# Altium PCB nRF2788_Wireless Mic TX_rev 1_0.PcbDoc
Units mil, origin at the board's own origin, x right, y up, seen from the top; angles counter-clockwise.
Board outline 787.4 x 3270 mil, 2 copper layers (Top Layer, Bottom Layer); 64 components, 42 nets, 212 pads, 162 vias.
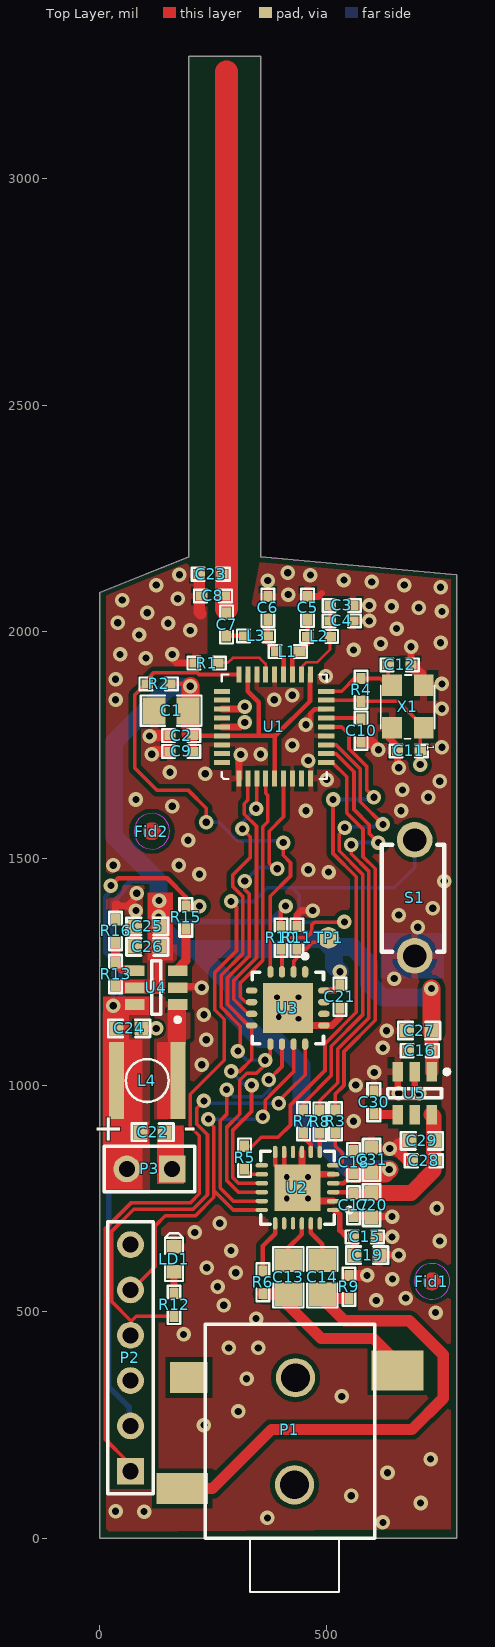
[diagram p0: Top Layer view]
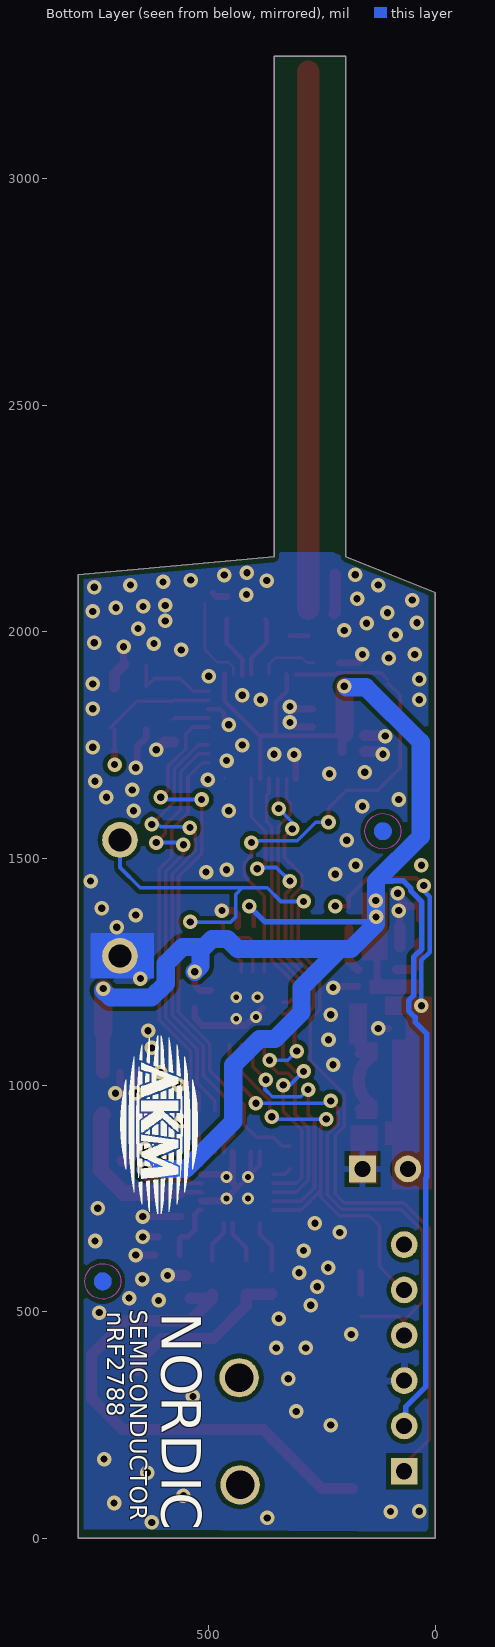
[diagram p1: Bottom Layer view, seen from below]

## Layer stack, top to bottom
Top Layer: signal copper 1.4
Dielectric: core 12.6, FR-4, Dk 4.8
Bottom Layer: signal copper 1.4

## Board outline
0,0 0,2086.61 196.85,2165.35 196.85,3270 355,3270 355,2165 787.4,2125.52 787.4,0

## Design rules (kind name [scope] priority, off if disabled: settings)
Clearance Clearance_2 [(InNamedPolygon('Bot_GND'))] p1: gap=10
Clearance Clearance_1 [(InNamedPolygon('Top_GND'))] p2: gap=10
Clearance [All] p3: gap=6
ComponentClearance [All] p1: gap=0 collisioncheckmode=3 verticalgap=10 showdistances=FALSE
MinimumSolderMaskSliver [All] p1: minsoldermaskwidth=0
PolygonConnect PolygonConnect_1 [isVia and innet(gnd)] p1: connectstyle=Direct reliefconductorwidth=10 reliefentries=4 polygonreliefangle="90 Angle"
PolygonConnect [All] p2: connectstyle=Relief reliefconductorwidth=15 reliefentries=4 polygonreliefangle="90 Angle"
RoutingVias [All] p1: holewidth=28 width=50 viastyle="Through Hole" minholewidth=28 minwidth=50 maxholewidth=28 maxwidth=50
SilkToSilkClearance [All] p1: silktosilkclearance=0
SilkscreenOverComponentPads [All] p1: minsilkscreentomaskgap=0
SolderMaskExpansion [All] p1: expansion=4
Width [All] p1: maxlimit=200 minlimit=6 preferedwidth=10 minimp=50.000000 maximp=50.000000 favimp=50.000000
24 further rules are at their usual default settings.

## Classes and differential pairs
component class nRF2460: C1 C2 C3 C4 C5 C6 C7 C8 C9 C10 C11 C12 C23 L1 L2 L3 R1 R2 R4 U1 X1
component class ADC: C13 C14 C15 C17 C18 C19 C20 C31 P1 R3 R5 R6 R7 R8 R9 U2
component class MCU: C16 C21 C22 C24 C25 C26 C27 C28 C29 C30 Fid1 Fid2 L4 LD1 P2 P3 R10 R11 R12 R13 R15 R16 S1 TP1 U3 U4 U5

## Components (designator, comment, footprint, x,y, rotation, side; value= is the part's Value field where it differs from the comment)
C1 "4.7µF" 0805 195,1826 r180 top
C2 "1.0nF" 0402s#1 205,1771 r180 top
C3 "2.2nF" 0402s#1 559,2058 r180 top
C4 "N.C." 0402s#1 559,2024 r180 top
C5 "1.2pF" 0402s#1 459,2078 r270 top
C6 "1.2pF" 0402s#1 371,2028 r90 top
C7 "1.5pF" 0402s#1 280,2041 r270 top
C8 "1.2pF" 0402s#1 225,2079 r0 top
C9 "10nF" 0402s#1 205,1736 r180 top
C10 "33nF" 0402s#1 577,1757 r90 top
C11 "15pF" 0402s#1 657,1737 r0 top
C12 "15pF" 0402s#1 687,1927 r180 top
C13 "10µF" 0805 416.38,538.62 r90 top
C14 "10µF" 0805 491.38,538.62 r90 top
C15 "100nF" 0402s#1 610,665 r180 top
C16 "100nF" 0402s#2 706,1076 r0 top
C17 "100nF" 0402s#1 560,710 r90 top
C18 "100nF" 0402s#1 560,805 r90 top
C19 "2.2µF" 0603s 590,625 r180 top
C20 "10µF" 0603s 600,735 r90 top
C21 "100nF" 0402s#1 530,1170 r90 top
C22 "4.7µF" 0603s 117,896 r180 top
C23 "N.C." 0402s#2 245,2127 r0 top
C24 "4.7µF" 0603s 65,1125 r180 top
C25 "4.7µF" 0603s 105,1350 r0 top
C26 "4.7µF" 0603s 105,1305 r0 top
C27 "1.0µF" 0603s 705,1120 r0 top
C28 "100nF" 0402s#2 715,833 r0 top
C29 "1.0µF" 0603s 711,877 r0 top
C30 "10nF" 0402s#2 605,962 r270 top
C31 "10µF" 0603s 600,835 r90 top
Fid1 "Fiducial mark" Fiducial 733,567 r90 top
Fid2 "Fiducial mark" Fiducial 115.13,1560 r90 top
L1 "4.7nH" 0402s#1 390,1956 r0 top
L2 "8.2nH" 0402s#1 459,1990 r0 top
L3 "5.6nH" 0402s#1 370,1991 r180 top
L4 "4.7µH" WE-TPC_TYPE_S 105,1010 r90 top
LD1 "L0603W" LED_0603 164,643 r270 top
P1 "Header 3" HEADPHONE 607,0 r90 top
P2 "Header 6" HDR1X6 68,148 r90 top
P3 "Header 2" HDR1X2 160,815 r180 top
R1 "22k" 0402s#1 211,1931 r0 top
R2 "22k" 0402s#1 105,1885 r0 top
R3 "56R" 0402s#2 520,920 r90 top
R4 "1M0" 0402s#1 577,1897 r270 top
R5 "56R" 0402s#1 320,815 r90 top
R6 "1k" 0402s#1 360,540 r90 top
R7 "56R" 0402s#1 450,895 r90 top
R8 "56R" 0402s#1 485.59,894.41 r90 top
R9 "1k" 0402s#1 550,580 r270 top
R10 "47k" 0402s#1 400,1300 r90 top
R11 "10k" 0402s#1 435,1300 r90 top
R12 "1k" 0402s#1 164,490 r90 top
R13 "1M0" 0402s#2 35,1245 r270 top
R15 "0R" 0402s#2 190,1370 r270 top
R16 "180k" 0402s#2 35,1340 r270 top
S1 "SW-PB" E-Switch 695,1285 r90 top
TP1 "TP" TP 505,1325 r90 top
U1 "nRF2460" Nordic_QFN36 385,1791 r90 top
U2 "AK5700VN" QFN50P400X400X80-24N 436.38,773.62 r180 top
U3 "16F684" QFN65P400X400X100-16N 415,1170 r270 top
U4 "TPS61070" SOT95P280X110-6N 125,1215 r180 top
U5 "TPS78930" SOT95P280X145-6N 695,982 r270 top
X1 "16MHz" BT-XTAL_3225 680,1835 r90 top

## Footprints (in the part's own frame and the unit in brackets; to place one, negate y for a bottom-side part, rotate by r counter-clockwise, add the part's x,y. Pads: shape width x height; smd on the part's side, far side on the other; paste and mask are expansions set on the pad)
0402s#1 [mil] "SMD 0402s footprint"
  rect 25x20 smd: 1(0,0) 2(50,0)
  silkscreen extent -17,-14 67,14
0402s#2 [mil] "SMD 0402s footprint"
  rect 25x20 smd: 1(-25,0) 2(25,0)
  silkscreen extent -42,-14 42,14
0603s [mil] "SMD 0603s footprint"
  rect 30x30 smd: 1(-27,0) 2(27,0)
  silkscreen extent -46,-19 46,19
0805 [mm] "SMD 0805 footprint"
  rect 1.3x1.5 smd: 1(0,0) 2(1.9,0)
  silkscreen extent -0.75,-0.85 2.65,0.85
BT-XTAL_3225 [mm] "Mercury X32 series"
  rect 1.2x1.1 smd: 1(-1.194,-0.89) 2(1.194,-0.89) 3(1.194,0.888) 4(-1.194,0.891)
  silkscreen extent -1.8,-1.5 1.78,1.52
E-Switch [mm]
  round 2 hole 1.3: 1(0,0) 2(6.5,0)
  silkscreen extent 0.22,-1.65 6.22,1.85
Fiducial [mil] "Fiducial Mark"
  Top Layer circle w19.68: c0,0 r9.87
  Bottom Layer circle w19.68: c0,0 r9.87
  Keep-Out Layer circle w0.39: c0,0 r39.37
HDR1X2 [mm] "Connector; Header; 2 Position"
  rect 1.5x1.5 hole 0.9: 1(0,0)
  round 1.5 hole 0.9: 2(2.54,0)
  silkscreen extent -1.27,-1.27 3.81,1.27
HDR1X6 [mm] "Connector; Header; 6 Position"
  rect 1.5x1.5 hole 0.9: 1(0,0)
  round 1.5 hole 0.9: 2(2.54,0) 3(5.08,0) 4(7.62,0) 5(10.16,0) 6(12.7,0)
  silkscreen extent -1.27,-1.27 13.97,1.27
HEADPHONE [mm]
  round 2.2 hole 1.6: 0(3,4.5) 0(9,4.445)
  rect 1.75x2.1 smd: 1(9.017,10.414)
  rect 2.25x2.9 smd: 2(9.398,-1.27)
  rect 1.75x2.9 smd: 3(2.794,10.795)
  silkscreen extent -3,0 12,9.5, body extent 0,0 12,9.5, height 5
LED_0603 [mil]
  rect 30x32 smd: 1(0,0) 2(55,0)
  silkscreen extent -30,-20 75,20
Nordic_QFN36 [mm]
  rect 0.9x0.28 smd: 1(-2.916,1.975) 2(-2.916,1.475) 3(-2.916,0.975) 4(-2.916,0.475) 5(-2.916,-0.025) 6(-2.916,-0.525) 7(-2.916,-1.025) 8(-2.916,-1.525) 9(-2.916,-2.025) 19(2.916,-2.025) 20(2.916,-1.525) 21(2.916,-1.025) 22(2.916,-0.525) 23(2.916,-0.025) 24(2.916,0.475) 25(2.916,0.975) 26(2.916,1.475) 27(2.916,1.975)
  rect 0.28x0.9 smd: 10(-2.025,-2.916) 11(-1.525,-2.916) 12(-1.025,-2.916) 13(-0.525,-2.916) 14(-0.025,-2.916) 15(0.475,-2.916) 16(0.975,-2.916) 17(1.475,-2.916) 18(1.975,-2.916) 28(1.975,2.916) 29(1.475,2.916) 30(0.975,2.916) 31(0.475,2.916) 32(-0.025,2.916) 33(-0.525,2.916) 34(-1.025,2.916) 35(-1.525,2.916) 36(-2.025,2.916)
  silkscreen extent -2.94,-2.94 2.91,2.94
QFN50P400X400X80-24N [mm] "QFN, 24-Leads, Body 4,1x4,1mm (max), Pitch 0,50mm, IPC Medium Density"
  oval 0.7x0.25 smd: 1(-2,1.25) 2(-2,0.75) 3(-2,0.25) 4(-2,-0.25) 5(-2,-0.75) 6(-2,-1.25) 13(2,-1.25) 14(2,-0.75) 15(2,-0.25) 16(2,0.25) 17(2,0.75) 18(2,1.25)
  oval 0.25x0.7 smd: 7(-1.25,-2) 8(-0.75,-2) 9(-0.25,-2) 10(0.25,-2) 11(0.75,-2) 12(1.25,-2) 19(1.25,2) 20(0.75,2) 21(0.25,2) 22(-0.25,2) 23(-0.75,2) 24(-1.25,2)
  rect 2.6x2.6 smd: 25(0,0)
  silkscreen extent -3.03,-2.05 2.05,2.05, body extent -2.05,-2.05 2.05,2.05, height 0.8
QFN65P400X400X100-16N [mm] "QFN, 16-Leads, Body 4,0x4,0mm (max), Pitch 0,65mm, IPC Medium Density"
  oval 0.65x0.35 smd: 1(-2.025,0.975) 2(-2.025,0.325) 3(-2.025,-0.325) 4(-2.025,-0.975) 9(2.025,-0.975) 10(2.025,-0.325) 11(2.025,0.325) 12(2.025,0.975)
  oval 0.35x0.65 smd: 5(-0.975,-2.025) 6(-0.325,-2.025) 7(0.325,-2.025) 8(0.975,-2.025) 13(0.975,2.025) 14(0.325,2.025) 15(-0.325,2.025) 16(-0.975,2.025)
  rect 2.8x2.8 smd: 17(0,0)
  silkscreen extent -3.02,-2 2,2, body extent -2,-2 2,2, height 1
SOT95P280X110-6N [mm] "SOT23, 6-Leads, Body 3,0x3,0mm (max), Pitch 0,95mm, IPC Medium Density"
  rect 1.1x0.6 smd: 1(-1.2,0.95) 2(-1.2,0) 3(-1.2,-0.95) 4(1.2,-0.95) 5(1.2,0) 6(1.2,0.95)
  silkscreen extent -1.33,-1.5 0.25,1.92, body extent -0.87,-1.52 0.87,1.53, height 1.1
SOT95P280X145-6N [mm] "SOT23, 6-Leads, Body 3,0x3,0mm (max), Pitch 0,95mm, IPC Medium Density"
  rect 1.1x0.6 smd: 1(-1.2,0.95) 2(-1.2,0) 3(-1.2,-0.95) 4(1.2,-0.95) 5(1.2,0) 6(1.2,0.95)
  silkscreen extent -1.32,-1.5 0.25,1.92, body extent -0.87,-1.52 0.87,1.53, height 1.45
TP [mm]
  round 1.2 smd paste-1.2: 1(0,0)
WE-TPC_TYPE_S [mm] "Inductor SMD"
  rect 4.3x0.85 smd: 1(0,1.725) 2(0,-1.725)
  Top Layer lines w0.15: -2.075,1.7 -2.075,0.625 -1.2,0.625 ; 2.075,1.5 2.075,0.625 1.2,0.625 ; -1.2,-0.625 -2.075,-0.625 -2.075,-1.7 ; 1.2,-0.625 2.075,-0.625 2.075,-1.7
  Top Layer lines w0.5: -1.9,1.9 -1.9,1.725 -1.9,0.8 ; -1.5,1.8 -1.5,1.725 -1.5,0.8 ; 1.5,1.8 1.5,1.725 1.5,0.8 ; 1.9,1.8 1.9,1.725 1.9,0.8 ; -1.9,-0.8 -1.9,-1.5 ; -1.6,-0.8 -1.6,-1.6 ; 1.5,-0.8 1.5,-1.6 ; 1.9,-0.8 1.9,-1.6
  Top Layer lines w0.7: -1.332,0.922 cw(c0,0) 1.332,0.922 ; -1.332,-0.922 ccw(c0,0) 1.332,-0.922
  silkscreen extent -1.2,-1.2 1.2,1.2

## Part data
C1: library part C0805-4µ7, "Chip Cap 0805"
C2: library part C0402-1n0, "Chip Cap 0402"
C3: library part C0402-2n2, "Chip Cap 0402"
C4 C23: library part C0402-N.C., "Chip Cap 0402"
C5 C6 C8: library part C0402-1.2p, "Chip Cap 0402"
C7: library part C0402-1.5p, "Chip Cap 0402"
C9 C30: library part C0402-10n, "Chip Cap 0402"
C10: library part C0402-33n, "Chip Cap 0402"
C11 C12: library part C0402-15p, "Chip Cap 0402"
C13 C14: library part C0805-10µ, "Chip Cap 0805"
C15 C16 C17 C18 C21 C28: library part C0402-100n, "Chip Cap 0402"
C19: library part C0603-2µ2, "Chip Cap 0603"
C20 C31: library part C0603-10µ, "Chip Cap 0603"
C22 C24 C25 C26: library part C0603-4µ7, "Chip Cap 0603"
C27 C29: library part C0603-1µ0, "Chip Cap 0603"
Fid1 Fid2: library part Fid-Mark, "Fiducial Mark"
L1: library part L0402-4n7, "Chip Ind 0402"
L2: library part L0402-8n2, "Chip Ind 0402"
L3: library part L0402-5n6, "Chip Ind 0402"
L4: library part "WE-TPC Type S - 4µ7", "Inductor Power 4.7uH 1.2A SMD"
LD1: library part 19-213/W1D, "LED 0603, 19-213/W1D"
P1: "Header, 3-Pin"
P2: "Header, 6-Pin"
P3: "Header, 2-Pin"
R1 R2: library part R0402-22k, "Chip Res 0402"
R3 R5 R7 R8: library part R0402-56R, "Chip Res 0402"
R4 R13: library part R0402-1M0, "Chip Res 0402"
R6 R9 R12: library part R0402-1k0, "Chip Res 0402"
R10: library part R0402-47k, "Chip Res 0402"
R11: library part R0402-10k, "Chip Res 0402"
R15: library part R0402-0R, "Chip Res 0402"
R16: library part R0402-180k, "Chip Res 0402"
S1: "Switch"
U1: "2.4GHz Single Chip Wireless Audio Streamer"
U4: "IC BOOST CONV 600MA SW TSOT23-6"
X1: library part "XTAL SMD 16MHz (3225)", "XTAL SMD 16MHz, 9pF, Mercury"

## Via types
v1: diameter 32, hole 16, Top Layer to Bottom Layer, tented top, 154 vias
v2: diameter 25.98, hole 12.99, Top Layer to Bottom Layer, tented top, 8 vias

## Nets (pads, with @x,y where several pads share a name; then routed paths per layer and width w, separated by ;. In a path a pad name is that pad's centre, name@x,y a point inside that pad or via, vN(x,y) a via of type N, cw(c..) or ccw(c..) an arc to the next point about the centre after c; other vN are vias at no path point)
AVDD: C17.2 C20.2 C28.2 C29.2 U2.3 U5.6 | length 537.4
  Top Layer w10: U2.3 556.22,763.78 C17.2 ; 732.4,857 U5.6
  Top Layer w20: C17.2 685,760 687,762
  Top Layer w35: C20.2 687,762 737,812 737,855 ; U5.6 737,930.16 737,852
DVDD: C1.1 C2.1 C9.1 C16.2 C18.1 C21.2 C25.2 C26.2 C27.2 C31.1 P2.2 R2.2 R10.2 R13.2 U1.5 U1.19 U1.26 U1.33 U2.4 U3.16 U4.5 U5.1 | length 5191
  Top Layer w10: R2.2 195,1885 v1(200,1880) ; C2.1@205,1770.33 U1.33 355,1770.33 ; U1.26 326.93,1868.43 351,1844.36 351,1774.33 355,1770.33 ; U1.5 385.98,1769.98 ; R10.2 400,1385 v1(410,1395) ; U1.19@464,1907 464,1847 387.33,1770.33 355,1770.33 ; U2.4 538.46,783.46 C18.1
  Top Layer w15: U4.5@85.35,1217.4 111.54,1217.4 127.96,1233.82 127.96,1300.96 C26.2 ; U3.16 518.39,1208.39 C21.2 v1(530,1250)
  Top Layer w20: R13.2 35,1217.4 U4.5@85.35,1217.4 ; C9.1 205,1770.33 C2.1
  Top Layer w30: 732,1097 732.4,1096.6 U5.1
  Top Layer w40: C2.1@200,1776 v1(200,1880) ; C18.1 560.5,805.5 630.5,805.5 v1(639,814) ; C27.2@732,1117 C27.2 v1(732,1213)
  Bottom Layer w12: P2.2@61,234 65,238 65,290 20,335 20,794.74 18.47,796.27 18.47,1113.47 44,1139 44,1149.4 58,1163.4 58,1186.6 47,1197.6 47,1282.04 29,1300.04 29,1404.4 54,1429.4 54,1434.6 70.4,1451 93.6,1451 94.6,1450 130,1450 ; v1@130,1375 145,1360 375,1360 v1(410,1395)
  Bottom Layer w40: v1@195,1877.5 152.5,1877.5 31.47,1756.47 31.47,1548.53 130,1450 130,1375 130,1355 185,1300 210,1300 ; v1(530,1250) 517,1263 517,1297.4 509.7,1304.7 ; v1(639,814) 637.88,815.12 549.88,815.12 445,920 445,1044.4 387.4,1102 352.86,1102 294.86,1160 294.86,1215.14 210,1300 ; v1@732,1209 716,1193 625.23,1193 594,1224.23 594,1268 557.3,1304.7 509.7,1304.7 ; 210,1300 435.6,1300 457.6,1322 492.4,1322 509.7,1304.7
  other v1: 129.99,1371 131,1407
GND: C1.2 C2.2 C3.1 C4.1 C5.1 C6.2 C8.1 C9.2 C10.1 C11.1 C12.1 C15.1 C16.1 C17.1 C18.2 C19.1 C20.1 C21.1 C22.1 C23.1 C24.1 C25.1 C26.1 C27.1 C28.1 C29.1 C30.1 C31.2 LD1.1 P2.3 P3.1 R1.1 R9.1 R11.2 R16.1 S1.1 U1.1 U1.7 U1.9 U1.13 U1.16 U1.23 U1.25 U1.30 U1.32 U1.34 U2.2 U2.5 U2.9 U2.11 U2.12 U2.25 U3.13 U3.17 U4.2 U5.2 U5.3 X1.2 X1.4 | length 1996.3
  Top Layer w6: U1.9 U1.9@465,1676.47
  Top Layer w10: U2.12 387.17,822.83 U2.25@406.85,803.15 ; U2.11 U2.25@406.85,803.15 ; U2.25 v2(412.76,797.24) U2.25@406.85,803.15 ; v1@465,1805 465,1820 474.39,1829.39 U1.16
  Top Layer w15: R16.1 35,1400 40,1400 40,1395 57,1395 59,1393 82,1416 v1(82,1423) ; C25.1 v1@78,1383 ; C24.1@102,1125 v1(125,1125) ; v1@160,1940 169,1931 R1.1 ; U4.2@170,1217.4 222.6,1217.4 v1(225,1215) ; U1.32 310.02,1790.01 v1(320,1800) ; U1.30 324.39,1829.39 v1@325,1830 ; U1.1 307.24,1725.24 v1(311,1729) ; U3.17@380,1170 418.39,1131.61 U3.13 512.47,1131.61 530,1149.15 C21.1 ; R11.2 435,1375 445,1385 v1(470,1385) ; U2.9 U2.25@446.22,815 ; U2.25@448.38,817.16 U2.25@446.22,815 ; C5.1 483,2078 490,2085 ; U2.2 465.91,744.09 v2(460,750) U2.25 U2.25@446.22,783.46 ; U2.5 465.91,803.15 U2.25@446.22,783.46 ; C17.1 v1(645,710) ; C15.1 v1(645,665) ; C19.1 v1(660,625) ; X1.4@636.94,1784.99 636.94,1767.06 657,1747 C11.1 657,1703 v1(660,1700) ; v1@657.6,984.6 U5.3 ; C12.1 v1(687,1967) ; U5.2 695,987 v1@700,982 ; U2.25@446.22,783.46 U2.25@446.22,815
  Top Layer w25: C26.1 C25.1 ; v1(110,1770) 111,1771 C2.2 ; v1(115,1730) 121,1736 C9.2 ; C23.1 220,2043 223,2040 ; R9.1 v1(590,580) ; C10.1 598,1757 v1(615,1740) ; 659,869.5 659,865.5 653.5,860 680.5,833 C28.1 ; C12.1 707.06,1906.94 X1.2@707.06,1879.01
  other v1: 625,35 370,45 98,59 35,60 708,78 555,94 635,145 730,175 230,250 306,280 534,313 324,352 285,420 350,420 185,450 345,485 741,498 274,514 610,525 675,530 260,555 646,572 300,586 236,597 290,635 750,656 210,675 265,695 744,728 640,860 560,920 660,982 705,982 565,1000 606,1028 225,1045 625,1082 235,1100 633,1120 230,1155 650,1235 702,1348 660,1375 80,1385 735,1390 760,1450 220,1465 505,1470 460,1475 30,1485 175,1485 195,1540 455,1605 665,1605 160,1615 80,1630 725,1635 668,1651 750,1670 501,1674 233,1687 155,1690 460,1716 355,1730 755,1745 425,1750 455,1795 755,1830 320,1835 35,1850 385,1850 425,1860 755,1885 35,1895 499,1902 102,1942 45,1950 160,1950 560,1960 620,1974 752,1976 87,1993 200,2003 655,2007 151,2019 40,2020 595,2024 105,2042 755,2045 704,2053 644,2056 595,2058 50,2070 172,2073 416,2082 752,2098 125,2103 672,2103 600,2110 371,2113 539,2114 465,2125 176,2126 415,2130
  other v2: 412.76,750 460,797.24 438.62,1146.38 395,1150 391.38,1193.62 438.62,1193.62
MCLR: P2.1 R10.1 S1.2 U3.3 | length 2438.5
  Top Layer w8: P2.1@61,134 61,170 13,218 13,683.8 69.2,740 200,740 220,760 220,888.43 200,908.43 200,980 275,1055 275,1145.2 254,1166.2 254,1248.2 302,1296.2 302,1393 v1(290,1405) ; R10.1@400,1295 R10.1 ; U3.3 402.2,1297.8 R10.1 ; v1(540,1360) 539,1359 474,1359 467.5,1352.5 467.5,1336.5 456,1325 410,1325 400,1315 R10.1
  Bottom Layer w8: v1(290,1405) 340,1405 370,1435 425,1435 ; v1(540,1360) 539,1359 451,1359 440,1370 440,1420 425,1435 ; S1.2 695,1480 650,1435 425,1435
NetC3_2: C3.2 C4.2 L2.2 U1.20 | length 197.4
  Top Layer w6: U1.20 445.04,1922.08 455.48,1932.53 479.53,1932.53 508,1961 C3.2@508,2063
NetC5_2: C5.2 L1.2 L2.1 U1.21 | length 139.1
  Top Layer w10: U1.21@425,1904 425,1940 459,1974 L2.1 C5.2 C5.2@459,2029
NetC6_1: C6.1 L1.1 L3.1 U1.22 | length 138.2
  Top Layer w10: C6.1@375,2028 371,2024 371,1976 405.67,1941.33 U1.22
NetC7_1: C7.1 C8.2 C23.2 | length 1221.8
  Top Layer w10: C7.1 C8.2@280,2078
  Top Layer w50: C7.1@280,2051 280,3235.81
NetC7_2: C7.2 L3.2 | length 41
  Top Layer w10: C7.2@279,1991 C7.2 L3.2
NetC10_2: C10.2 U1.15 | length 78.3
  Top Layer w8: U1.15 574.3,1809.7 C10.2
NetC11_2: C11.2 R4.2 U1.17 X1.1 | length 319.7
  Top Layer w8: U1.17 574.93,1849.07 R4.2 602,1847 658,1847 715.06,1789.94 X1.1 ; C11.2 707.06,1737.06 X1.1@707.06,1784.99
  Top Layer w15: v1(707,1707) C11.2
NetC12_2: C12.2 R4.1 U1.18 X1.3 | length 204.4
  Top Layer w8: U1.18 533.76,1868.76 562,1897 R4.1 619.07,1897 637.06,1879.01 637.06,1926.94 C12.2
NetC13_1: C13.1 P1.2 R6.1 | length 392.6
  Top Layer w25: R6.1 361.38,538.62 C13.1 416.38,513.62 489,441 604,441 657,388 P1.2
NetC13_2: C13.2 U2.22 | length 93.8
  Top Layer w10: C13.2 416.38,641.38 446.22,671.22 U2.22
NetC14_1: C14.1 P1.3 R9.2 | length 1134.4
  Top Layer w25: P1.3 249,110 379,240 689,240 758,309 758,405 683,480 540,480 491.38,528.62 C14.1 500,530 540,530
NetC14_2: C14.2 U2.23 | length 92
  Top Layer w10: U2.23 465.91,674.09 491.38,648.62 C14.2
NetC15_2: C15.2 C19.2 U2.1 | length 131.2
  Top Layer w12: U2.1 520.59,724.41 530,715 530,680 545,665 C15.2 563,662 C19.2
NetC30_2: C30.2 U5.4 | length 50.4
  Top Layer w20: C30.2@607.24,934.76 U5.4
NetL4_2: L4.2 U4.1
NetLD1_2: LD1.2 R12.2 | length 48
  Top Layer w15: R12.2 LD1.2
NetP2_4: P2.4 R12.1 U3.12 | length 1146
  Top Layer w8: P2.4@71,448 70,449 70,479 ; R12.1 81,490 70,479 ; v1(230,965) 214,949 214,914.23 238,890.23 238,758.2 205.8,726 75,726 27,678 27,522 70,479 ; v1(395,960) 395,964.8 419.2,989 419.4,989 453.39,1022.98 U3.12
  Bottom Layer w8: v1@220,965 v1(230,965) 235,960 v1(395,960)
NetP2_5: P2.5 U2.18 U3.11 | length 929.8
  Top Layer w8: P2.5@71,548 122,599 122,689 145,712 211.6,712 252,752.4 252,767.3 ; v1(240,925) 240,920 252,908 252,767.3 ; U2.18 294.89,724.41 252,767.3 ; v1(360,930) 360,935 365,940 365,966.77 384.23,986 427.8,1029.56 U3.11
  Bottom Layer w8: v1(240,925) 355,925 v1(360,930)
NetR1_2: R1.2 U1.24 | length 132.7
  Top Layer w6: R1.2@267,1931 268,1932 283.33,1932 293.86,1942.53 352.47,1942.53 366.3,1928.7 U1.24
NetR2_1: R2.1 U1.27 U3.4 | length 1138.3
  Top Layer w8: R2.1 102,1885 77,1860 77,1700 127,1650 196,1650 235,1611 v1(235,1580) ; 105,1895 120,1910 215,1910 219.19,1905.81 U1.27 ; U3.4 376.61,1416.61 421,1461 421,1490.77 405,1506.77 v1(405,1535)
  Bottom Layer w8: v1@230,1580 v1(235,1580) 263.23,1580 304.23,1539 401,1539 v1(405,1535)
NetR3_1: R3.1 U2.6 | length 94.1
  Top Layer w8: U2.6 527.83,822.83 535,830 535,850 520,865 R3.1
NetR3_2: R3.2 U1.10 | length 855.7
  Top Layer w8: U1.10 513.73,1711.27 545,1680 545,1600.4 581,1564.4 581,1504 608,1477 608,1143 539,1074 539,999.2 520,980.2 R3.2
NetR5_1: R5.1 U2.14 | length 42.5
  Top Layer w8: R5.1 331.85,803.15 U2.14
NetR5_2: R5.2 U1.14 | length 1252
  Top Layer w8: R5.2 336.77,865 356.38,884.62 393.62,884.62 421,912 421,956 497,1032 497,1091.4 566,1160.4 566,1459.6 514.63,1510.97 514.63,1629.63 v1(515,1630) ; U1.14 533.98,1790.01 550,1774 550,1741.9 589,1702.9 589,1651 v1(605,1635) ; v1@519,1619 v1@520,1620
  Bottom Layer w8: v1(515,1630) 615,1630 610,1635 v1(605,1635)
NetR6_2: R6.2 U2.19 | length 116.1
  Top Layer w10: R6.2 360,645 387.17,672.17 U2.19
NetR7_1: R7.1 U2.8 | length 56.3
  Top Layer w10: R7.1@445,900 445,890 465.91,869.09 U2.8
NetR7_2: R7.2 U1.12 | length 1051.7
  Top Layer w8: R7.2 450,960 511,1021 511,1085.6 580,1154.6 580,1465.4 528.63,1516.77 528.63,1553.63 540.63,1565.63 v1(540.63,1568) ; U1.12 521.38,1750.64 ; 521.46,1750.64 575,1697.1 575,1625 v1(625,1575)
  Bottom Layer w8: v1(540.63,1568) 542.63,1570 605,1570 625,1590 v1(625,1575)
NetR8_1: R8.1 U2.7 | length 50
  Top Layer w10: R8.1@480,900 R8.1 U2.7
NetR8_2: R8.2 U1.11 | length 965
  Top Layer w8: R8.2 485.59,965.59 525,1005 525,1079.8 594,1148.8 594,1471.2 555,1510.2 v1(555,1530) ; U1.11 521.34,1730.96 561,1691.3 561,1607.74 595,1573.74 595,1555 v1(615,1535)
  Bottom Layer w8: v1(555,1530) 560,1535 v1(615,1535)
NetR11_1: R11.1 TP1.1 U3.2 | length 129.5
  Top Layer w8: U3.2 427.8,1272.8 435,1280 R11.1 455,1300 470,1315 TP1.1@505,1315
NetR13_1: R13.1 R16.2 U4.4 | length 101.6
  Top Layer w20: R16.2 R13.1 50.2,1254.8 U4.4@85.35,1254.8
NetR15_2: R15.2 U4.3 | length 98.5
  Top Layer w20: U4.3@170,1254.8 190,1274.8 R15.2
NetU1_2: U1.2 U3.7 | length 574.7
  Top Layer w8: U1.2 326.93,1628.7 319,1620.77 319,1597.77 346,1570.77 346,1280.8 296,1230.8 296,1189.2 328,1157.2 U3.7
NetU1_3: U1.3 U2.16 U3.9 | length 1195.4
  Top Layer w8: v1(305,1075) 310,1080 310,1130 268,1172 268,1242.4 316,1290.4 316,1415.77 294,1437.77 294,1464 332,1502 332,1548 v1(315,1565) ; v1(345,1610) 345,1620 346.61,1621.61 U1.3 ; U2.16 306.22,763.78 280,790 280,906.57 309,935.57 309,1010.77 324.23,1026 346,1026 376.61,1056.61 U3.9
  Bottom Layer w8: v1(305,1075) 325,1055 v1(365,1055) ; v1(315,1565) 315,1580 v1(345,1610)
NetU1_4: U1.4 U3.6 | length 538.7
  Top Layer w8: U3.6 322.2,1182.8 310,1195 310,1225 360,1275 360,1570 371,1581 371,1639 366.3,1643.7 U1.4
NetU1_6: U1.6 U2.15 U3.8 | length 1168.9
  Top Layer w6: U1.6@405,1675.52 U1.6
  Top Layer w8: v1(290,1030) 308.43,1030 335.28,1056.84 U3.8 328.39,1131.61 282,1178 282,1236.6 330,1284.6 330,1421.57 320,1431.57 v1(320,1450) ; v1(335,1000) 335,941.77 294,900.77 294,795.8 306.33,783.46 U2.15 ; v1@379,1484 374,1489 374,1560 405.67,1591.67 U1.6 ; v1(392,1477) 389,1477 388,1476 391,1476 v1@395,1480
  Bottom Layer w8: v1(290,1030) 320,1000 v1(335,1000) ; v1(320,1450) 350,1480 395,1480 391,1476 388,1476 389,1477 v1(392,1477)
NetU2_17: U2.17 U3.10 | length 579.2
  Top Layer w8: v1(280,990) 280,935 266,921 266,773.09 295,744.09 U2.17 ; v1@375,1020 370,1015 370,1014.38 372.84,1011.54 v1(373,1011.54) 402.2,1040.74 U3.10
  Bottom Layer w8: v1(280,990) 296,974 359,974 375,990 375,1020 370,1015 370,1014.38 372.84,1011.54 v1(373,1011.54)
VPO: C22.2 C24.2 L4.1 P3.2 R15.1 U4.6 | length 516.5
  Top Layer w10: v1(25,1440) 41,1456 149,1456 190,1415 R15.1 v1(220,1395)
  Bottom Layer w10: v1(25,1440) 25,1428.18 12,1415.18 12,1293 30,1275 v1(30,1175)
pads on no net: P1.0 P1.1 P2.6 U1.8 U1.28 U1.29 U1.31 U1.35 U1.36 U2.10 U2.13 U2.20 U2.21 U2.24 U3.1 U3.5 U3.14 U3.15 U5.5

## Polygon pours and split planes (outlines as drawn)
DVDD on Top Layer "Top_DVDD" (solid, pour order 17): 95,1210 95,1310 170,1310 170,1305 170,1210 165,1210
VPO on Top Layer "Top_VPO" (solid, pour order 7): 5,760 5,1195 45,1195 110,1195 110,1190 110,760 5,760
NetL4_2 on Top Layer "Top_L4" (solid, pour order 8): 120,925 200,925 200,1195 130,1195 120,1195 120,1026.89
GND on Top Layer "Top_GND" (solid, remove dead copper, pour order 15): 15,15 15,2080 225,2175 340,2175 360,2160 775,2120 775,20
DVDD on Top Layer "Top_DVDD" (solid, pour order 9): 112.4,1217.4 110,1217.4 110,1385 160,1385 160,1215 160,1210 110,1210
GND on Bottom Layer "Bot_GND" (solid, remove dead copper, pour order 10): 15,15 15,2080 225,2175 340,2175 360,2160 775,2120 775,20

## Keep-outs
Keep-Out Layer:
  the board outline again, w2

## Other copper
Top Layer:
  rectangle net DVDD: 105,1275 162,1425
  rectangle net VPO: 7.14,770 95,1100
  rectangle net VPO: 10,1090 65,1195
  rectangle net VPO: 7.14,1154.28 110,1195
  rectangle net NetL4_2: 150,1090 190,1180
  rectangle net GND: 126.47,782 186,911
  rectangle net DVDD: 26,1201 144,1233
  rectangle net VPO: 91,868 110,919.54
  rectangle net VPO: 7.14,1100 65,1163
  pour cut-out: 360,2190 334,2055 229.6,2055 230.31,2152.13 202.91,2156.17 196,2190
  pour cut-out: -5,717.5 -5,108 130,108 130,717.5
  pour cut-out: 420,1285.73 420,1225 485,1225 485,1285.73
  pour cut-out: 45,705 45,545 130,545 130,705
  pour cut-out: 297,1916 297,1879 268,1879 268,1916
  pour cut-out: 180,2174.58 380,2174.58 380,3270 180,3270
  pour cut-out: 365,705 510,705 510,845 365,845
  pour cut-out: 319.3,2055.81 495.3,2055.81 495.3,1905.81 237.3,1905.81 237.3,2085.81 319.3,2085.81
Bottom Layer:
  rectangle net GND: 620,1235 760,1335
  pour cut-out: 180,2175 380,2175 380,3270 180,3270
  pour cut-out: 185,1360 185,1320 390,1320 390,1360

## Silkscreen, mask and mechanical layers (free items; w line width, h text height)
Top Overlay:
  text "+" at 54,928 h60 r180
  text "-" at 214,926 h60 r180
Bottom Overlay:
  drawing of 888 lines, arcs and shapes, not listed
  text "SEMICONDUCTOR" at 686,503.79 h65 r90
  text "nRF2788" at 736,500 h65 r90
  text "NORDIC" at 632,499 h150 r90
Mechanical 1:
  the board outline again, w10

## Dimensions
0,0 to 787.4,0 on Top Overlay
787.4,0 to 355,3270 on Top Overlay

## Text inside footprints (layer, text, board x,y; h text height)
X1: Top Overlay "1" at 723,1751 h15 r270